# Altium PCB IS903_PCB.PcbDoc
Units mil, origin at the board's own origin, x right, y up, seen from the top; angles counter-clockwise.
Board outline 1299.21 x 551.18 mil, 4 copper layers (Top Layer, PWR, GND, Bottom Layer), stack 70.112 mil thick; 31 components, 62 nets, 442 pads, 139 vias.
Unrouted connection lines stored in the file: 101.
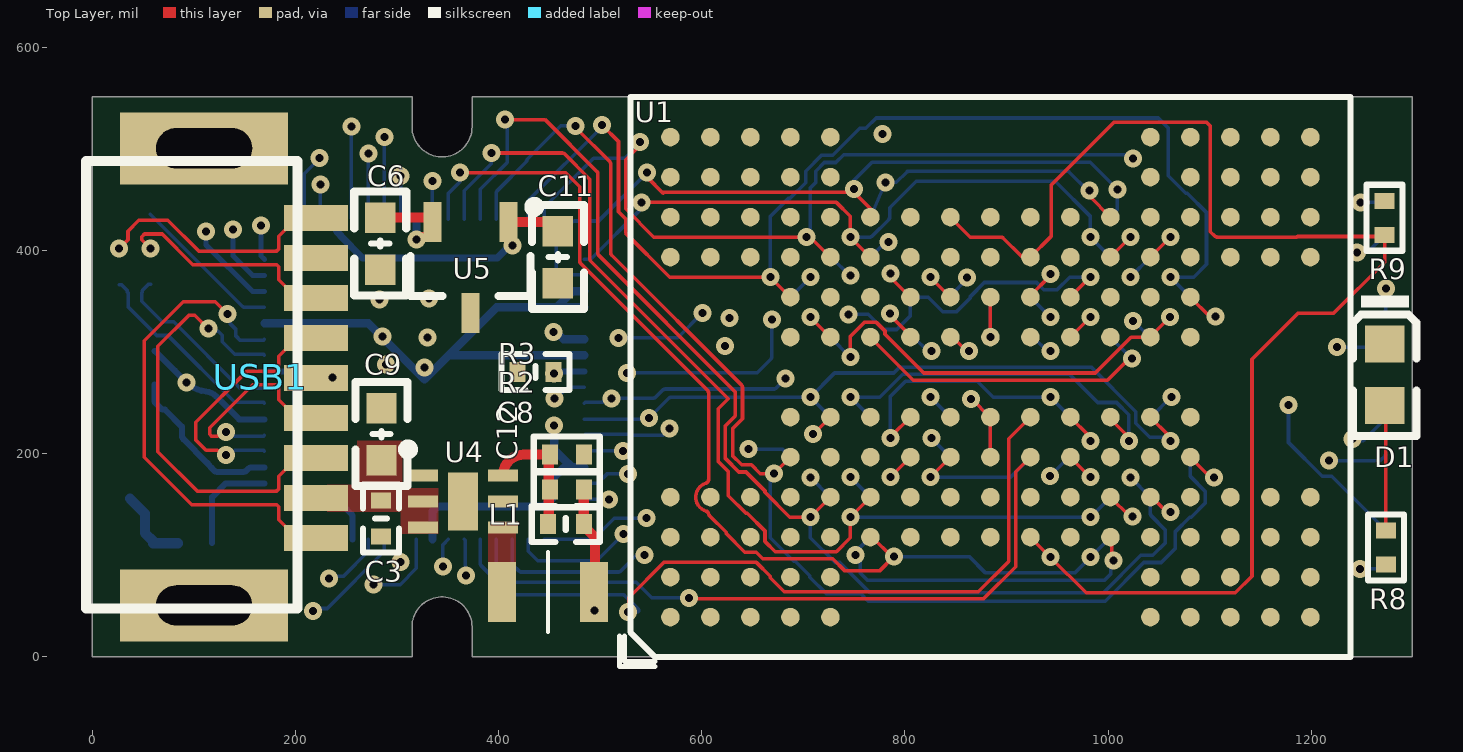
[diagram p0: Top Layer view]
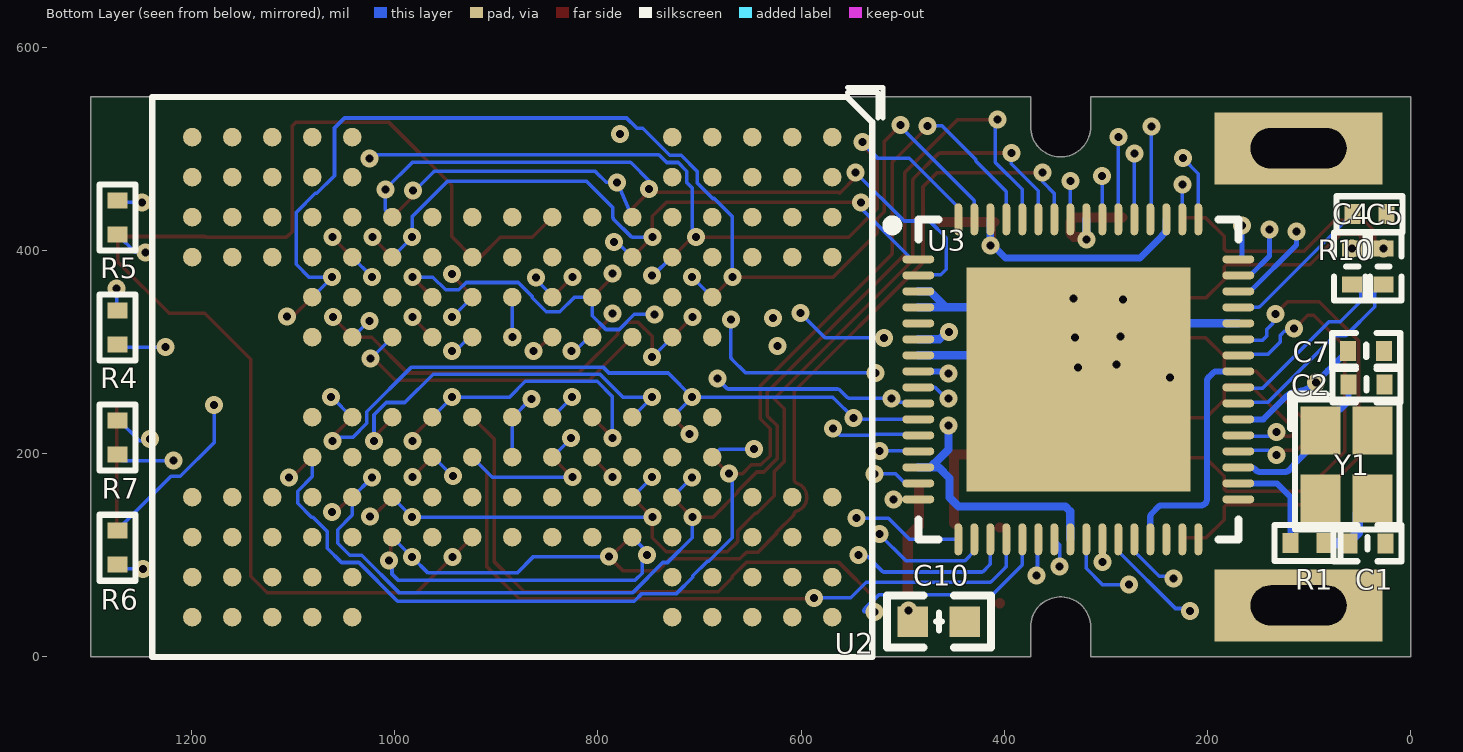
[diagram p1: Bottom Layer view, seen from below]
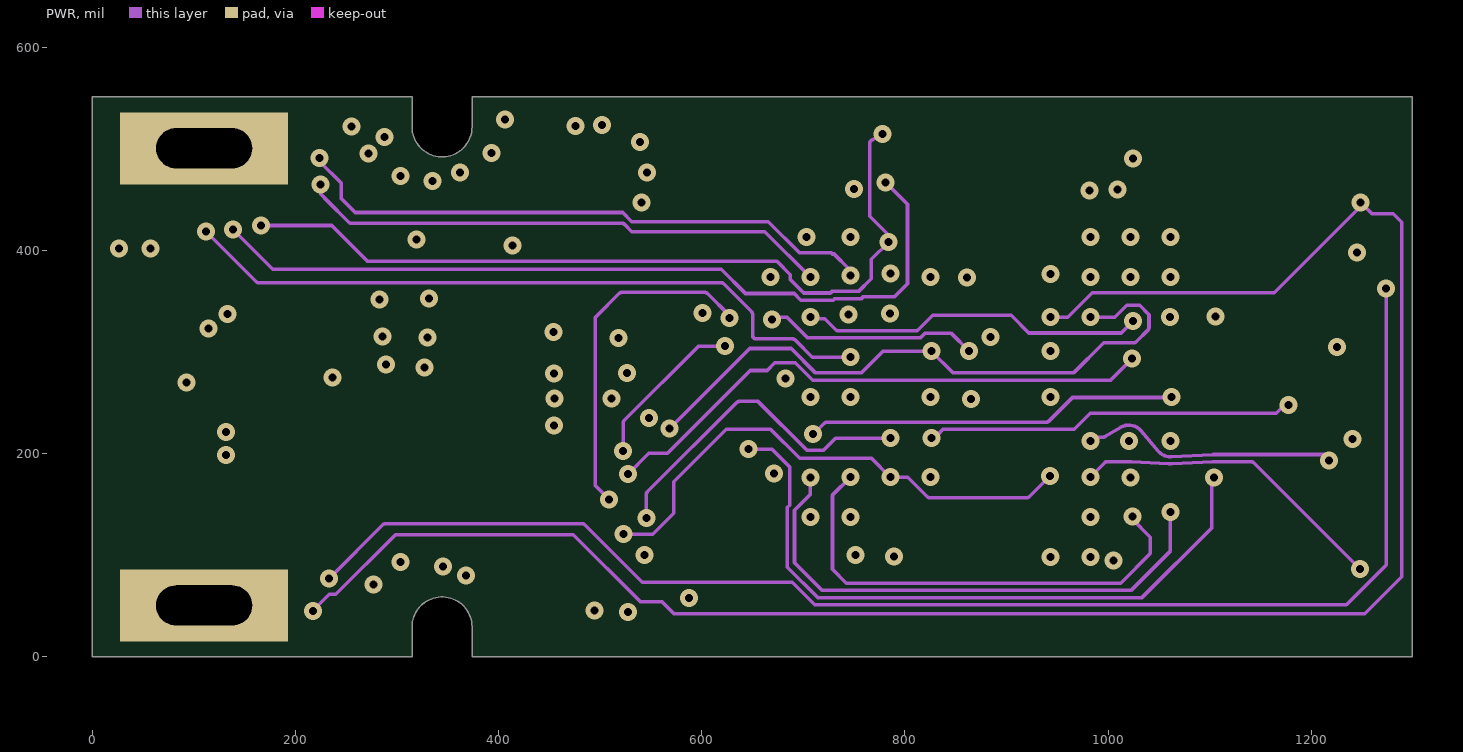
[diagram p2: PWR]
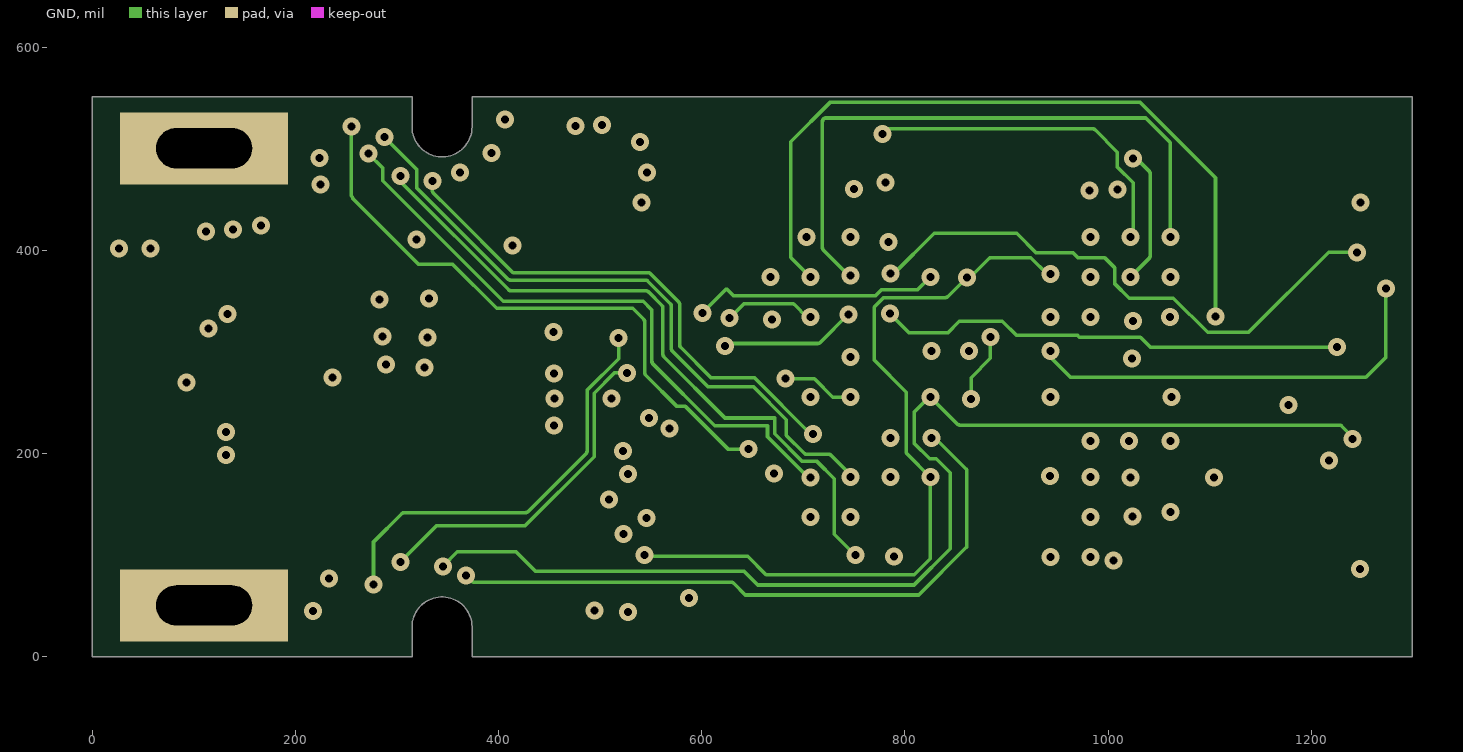
[diagram p3: GND]

## Layer stack, top to bottom
Top Solder: solder mask 1, SM-001, Dk 4
Top Layer: signal copper 1.378
Dielectric 2: prepreg 2.8, PP-006, Dk 4.1
PWR: signal copper 1.378
Dielectric 1: core 59, Core-043, Dk 4.3
GND: signal copper 1.378
Dielectric 3: prepreg 2.8, PP-006, Dk 4.1
Bottom Layer: signal copper 1.378
Bottom Solder: solder mask 1, SM-001, Dk 4

## Board outline
0,0 0,551.18 314.96,551.18 314.96,521.65 ccw(c344.49,521.65) 374.02,521.65 374.02,551.18 1299.21,551.18 1299.21,0 374.02,0 374.02,29.53 ccw(c344.49,29.53) 314.96,29.53 314.96,0

## Design rules (kind name [scope] priority, off if disabled: settings)
Clearance [All] p1: gap=3.5 ignorepadtopadclearanceinfootprint=TRUE except(5: Arc-THPad Arc-Via Arc-Hole Track-THPad Track-Via Track-Hole SMDPad-THPad SMDPad-Via SMDPad-Hole THPad-THPad THPad-Via THPad-Fill THPad-Poly THPad-Region THPad-Text THPad-Hole Via-Via Via-Fill Via-Poly Via-Region Via-Text Via-Hole Fill-Hole Poly-Hole Region-Hole Text-Hole)
DiffPairsRouting [All] p1: maxlimit=10 minlimit=10 mostfreqgap=10 toplayer_minwidth=3.5 toplayer_maxwidth=15 toplayer_prefwidth=15 midlayer1_minwidth=3.5 midlayer1_maxwidth=15 midlayer1_prefwidth=15 midlayer2_minwidth=3.5 midlayer2_maxwidth=15 midlayer2_prefwidth=15 bottomlayer_minwidth=3.5 bottomlayer_maxwidth=15 bottomlayer_prefwidth=15 maxuncoupledlength=500
FanoutControl Fanout_BGA [IsBGA] p1: bgadir=Out bgaviamode=Centered fanoutstyle=BGA fanoutdirection=Alternating viagrid=1 // Fanout_BGA (Default Rule)
PlaneClearance [All] p1: clearance=7
PlaneConnect [All] p1: planeconnectstyle=Direct reliefexpansion=20 reliefentries=4 reliefconductorwidth=10 reliefairgap=10
PolygonConnect [All] p1: connectstyle=Direct reliefconductorwidth=10 reliefentries=4 polygonreliefangle="90 Angle" airgapwidth=10
RoutingVias [All] p1: holewidth=7.87 width=17.72 viastyle="Through Hole" minholewidth=7.87 minwidth=17.72 maxholewidth=50 maxwidth=30
SolderMaskExpansion [All] p1: expansion=4 istentingtop=FALSE
UnRoutedNet [All] p1: checkbadconnections=TRUE
Width [All] p1: maxlimit=15 minlimit=3.5 preferedwidth=3.5 minimp=50.000000 maximp=50.000000 favimp=50.000000
25 further rules are at their usual default settings.

## Classes and differential pairs
net class F1CON: F1_ALE F1_CE0n F1_CE1n F1_CE2n F1_CE3n F1_CLE F1_DQS F1_REn F1_WEn
net class F0CON: F0_ALE F0_CE0n F0_CE1n F0_CE2n F0_CE3n F0_CLE F0_DQS F0_REn F0_WEn
net class F1IO: F1_IO0 F1_IO1 F1_IO2 F1_IO3 F1_IO4 F1_IO5 F1_IO6 F1_IO7
net class F0IO: F0_IO0 F0_IO1 F0_IO2 F0_IO3 F0_IO4 F0_IO5 F0_IO6 F0_IO7
differential pair NewDifferentialPair4: +NetC4_1 -NetC5_1
differential pair NewDifferentialPair3: +DP -DM
differential pair NewDifferentialPair2: +SSRXP -SSRXM
differential pair NewDifferentialPair1: +SSTXP -SSTXM

## Components (designator, comment, footprint, x,y, rotation, side; value= is the part's Value field where it differs from the comment)
C1 "20pF/6pF" "C 0402_L" 42.5,111.8 r180 bottom
C2 "20pF/6pF" "C 0402_L" 43.6,268.2 r180 bottom
C3 "0.01uF" "C 0402_L" 284.5,136.3 r270 top
C4 "0.1uF" "C 0402_L" 57.52,384.37 r270 bottom
C5 "0.1uF" "C 0402_L" 26.76,384.18 r270 bottom
C6 "10uF" "C 0603_L" 283.7,406.8 r90 top
C7 "1uF" "C 0402_L" 43.7,301.2 r0 bottom
C8 "20pF" "C 0402_L" 466.28,130.8 r180 top
C9 "4.7uF" "C 0603_L" 284.9,219.2 r270 top
C10 "10uF" "C 0603_L" 464.3,34.8 r0 bottom
C11 "4.7uF" "C 0603_L" 458.45,393.42 r90 top
C12 "0.1uF" "C 0402_L" 436.4,280.3 r180 top
D1 "R/W LED" 0603_LED_S1 1272.4,277.7 r270 top
L1 "4.7uH  ±10%" LQM2HPN1R0MG0L 448.8,63.8 r0 top
R1 "330R" "R 0402_L" 100.4,112 r0 bottom
R2 "453K" "R 0402_L" 466.28,164.95 r0 top
R3 "100K" "R 0402_L" 466.28,199.1 r0 top
R4 "0R" "R 0402_L" 1272.9,323.08 r90 bottom
R5 "0R" "R 0402_L" 1272.9,431.4 r90 bottom
R6 "0R" "R 0402_L" 1272.89,108.4 r270 bottom
R7 "0R" "R 0402_L" 1272.89,216.72 r270 bottom
R8 "330R" "R 0402_L" 1273.5,108.8 r270 top
R9 "0R" "R 0402_L" 1272.3,431.2 r90 top
R10 "100K" "R 0402_L" 41.62,435.68 r180 bottom
U1 "NAND FLASH BGA152" BGA152 1256.67,587.47 r180 top
U2 "NAND FLASH BGA152" BGA152 1256.73,-36.77 r180 bottom
U3 "IS903_QFN64_8*8" "QFN64 8x8_L" 327.12,273.19 r180 bottom
U4 "EML3020-DFN6" TDFN6 365.1,153 r0 top
U5 "EMP8733" SOT23-3L 372.3,382.9 r180 top
USB1 "USB 3.0 TYPE A" USB3.0-G 165.35,275.59 r0 top
Y1 "30MHZ" "OSC 2025-4P" 62.9,189.2 r270 bottom

## Footprints (in the part's own frame and the unit in brackets; to place one, negate y for a bottom-side part, rotate by r counter-clockwise, add the part's x,y. Pads: shape width x height; smd on the part's side, far side on the other; paste and mask are expansions set on the pad)
0603_LED_S1 [mm]
  rect 0.93x0.98 smd: A(0.77,0) K(-0.77,0)
  silkscreen extent -1.98,-0.79 1.54,0.79, body extent -0.8,-0.4 0.8,0.4, height 0.6
BGA152 [mm] "NAND FLASH"
  round 0.465 smd: A1(17.461,13.927) A2(17.461,12.927) A3(17.461,11.927) A4(17.461,10.927) A10(17.461,4.927) A11(17.461,3.927) A12(17.461,2.927) A13(17.461,1.927) B1(16.461,13.927) B2(16.461,12.927) B3(16.461,11.927) B4(16.461,10.927) B10(16.461,4.927) B11(16.461,3.927) B12(16.461,2.927) B13(16.461,1.927) C1(15.461,13.927) C2(15.461,12.927) C3(15.461,11.927) C4(15.461,10.927) C10(15.461,4.927) C11(15.461,3.927) C12(15.461,2.927) C13(15.461,1.927) D1(14.461,13.927) D2(14.461,12.927) D3(14.461,11.927) D4(14.461,10.927) D5(14.461,9.927) D6(14.461,8.927) D8(14.461,6.927) D9(14.461,5.927) D10(14.461,4.927) D11(14.461,3.927) D12(14.461,2.927) D13(14.461,1.927) E1(13.461,13.927) E2(13.461,12.927) E3(13.461,11.927) E4(13.461,10.927) E5(13.461,9.927) E6(13.461,8.927) E8(13.461,6.927) E9(13.461,5.927) E10(13.461,4.927) E11(13.461,3.927) E12(13.461,2.927) E13(13.461,1.927) F3(12.461,11.927) F4(12.461,10.927) F5(12.461,9.927) F6(12.461,8.927) F8(12.461,6.927) F9(12.461,5.927) F10(12.461,4.927) F11(12.461,3.927) G3(11.461,11.927) G4(11.461,10.927) G5(11.461,9.927) G6(11.461,8.927) G8(11.461,6.927) G9(11.461,5.927) G10(11.461,4.927) G11(11.461,3.927) H3(10.461,11.927) H4(10.461,10.927) H5(10.461,9.927) H6(10.461,8.927) H8(10.461,6.927) H9(10.461,5.927) H10(10.461,4.927) H11(10.461,3.927) J3(9.461,11.927) J4(9.461,10.927) J5(9.461,9.927) J6(9.461,8.927) J8(9.461,6.927) J9(9.461,5.927) J10(9.461,4.927) J11(9.461,3.927) K3(8.461,11.927) K4(8.461,10.927) K5(8.461,9.927) K6(8.461,8.927) K8(8.461,6.927) K9(8.461,5.927) K10(8.461,4.927) K11(8.461,3.927) L3(7.461,11.927) L4(7.461,10.927) L5(7.461,9.927) L6(7.461,8.927) L8(7.461,6.927) L9(7.461,5.927) L10(7.461,4.927) L11(7.461,3.927) M3(6.461,11.927) M4(6.461,10.927) M5(6.461,9.927) M6(6.461,8.927) M8(6.461,6.927) M9(6.461,5.927) M10(6.461,4.927) M11(6.461,3.927) N1(5.461,13.927) N2(5.461,12.927) N3(5.461,11.927) N4(5.461,10.927) N5(5.461,9.927) N6(5.461,8.927) N8(5.461,6.927) N9(5.461,5.927) N10(5.461,4.927) N11(5.461,3.927) N12(5.461,2.927) N13(5.461,1.927) P1(4.461,13.927) P2(4.461,12.927) P3(4.461,11.927) P4(4.461,10.927) P5(4.461,9.927) P6(4.461,8.927) P8(4.461,6.927) P9(4.461,5.927) P10(4.461,4.927) P11(4.461,3.927) P12(4.461,2.927) P13(4.461,1.927) R1(3.461,13.927) R2(3.461,12.927) R3(3.461,11.927) R4(3.461,10.927) R10(3.461,4.927) R11(3.461,3.927) R12(3.461,2.927) R13(3.461,1.927) T1(2.461,13.927) T2(2.461,12.927) T3(2.461,11.927) T4(2.461,10.927) T10(2.461,4.927) T11(2.461,3.927) T12(2.461,2.927) T13(2.461,1.927) U1(1.461,13.927) U2(1.461,12.927) U3(1.461,11.927) U4(1.461,10.927) U10(1.461,4.927) U11(1.461,3.927) U12(1.461,2.927) U13(1.461,1.927)
  silkscreen extent 0.46,0.93 18.73,15.17
"C 0402_L" [mm] "无极性贴片电容"
  rect 0.4x0.5 smd: 1(-0.45,0) 2(0.45,0)
  silkscreen extent -0.85,-0.45 0.85,0.45, body extent -0.5,-0.26 0.5,0.26, height 0.53
"C 0603_L" [mil] "无极性贴片电容"
  rect 30x30 smd: 1(-25.59,0) 2(25.59,0)
  silkscreen extent -51,-26 51,26, body extent -31,-16 31,16, height 32
LQM2HPN1R0MG0L [mm]
  rect 0.7x1.5 smd: 1(-1.15,0) 2(1.15,0)
  silkscreen extent 0,-1 0,1, body extent -1.43,-1 1.43,1, height 1.1
"OSC 2025-4P" [mm] "2*2.5*0.55mm(长宽高)"
  rect 1.2x1 smd: 1(-0.85,-0.65) 2(0.85,-0.65) 3(0.85,0.65) 4(-0.85,0.65)
  silkscreen extent -1.75,-1.4 1.63,1.32, body extent -1.25,-1 1.25,1, height 0.55
"QFN64 8x8_L" [mm] "PQFN, 64-Leads, Body 8.00x8.00mm, Pitch 0.40mm, Thermal Pad 5.60x5.60mm, IPC Low Density"
  oval 0.8x0.2 smd: 1(-4,3) 2(-4,2.6) 3(-4,2.2) 4(-4,1.8) 5(-4,1.4) 6(-4,1) 7(-4,0.6) 8(-4,0.2) 9(-4,-0.2) 10(-4,-0.6) 11(-4,-1) 12(-4,-1.4) 13(-4,-1.8) 14(-4,-2.2) 15(-4,-2.6) 16(-4,-3) 33(4,-3) 34(4,-2.6) 35(4,-2.2) 36(4,-1.8) 37(4,-1.4) 38(4,-1) 39(4,-0.6) 40(4,-0.2) 41(4,0.2) 42(4,0.6) 43(4,1) 44(4,1.4) 45(4,1.8) 46(4,2.2) 47(4,2.6) 48(4,3)
  oval 0.2x0.8 smd: 17(-3,-4) 18(-2.6,-4) 19(-2.2,-4) 20(-1.8,-4) 21(-1.4,-4) 22(-1,-4) 23(-0.6,-4) 24(-0.2,-4) 25(0.2,-4) 26(0.6,-4) 27(1,-4) 28(1.4,-4) 29(1.8,-4) 30(2.2,-4) 31(2.6,-4) 32(3,-4) 49(3,4) 50(2.6,4) 51(2.2,4) 52(1.8,4) 53(1.4,4) 54(1,4) 55(0.6,4) 56(0.2,4) 57(-0.2,4) 58(-0.6,4) 59(-1,4) 60(-1.4,4) 61(-1.8,4) 62(-2.2,4) 63(-2.6,4) 64(-3,4)
  rect 5.6x5.6 smd: 65(0,0)
  silkscreen extent -4.78,-4 4,4, body extent -4,-4 4,4, height 1
"R 0402_L" [mm] "1/16W贴片电阻"
  rect 0.4x0.5 smd: 1(-0.4,0) 2(0.45,0)
  silkscreen extent -0.8,-0.45 0.85,0.45, body extent -0.5,-0.25 0.5,0.25, height 0.3
SOT23-3L [mm] "3x1.3x1mm(长宽高)"
  rect 0.45x1 smd: 1(-0.95,-1.143) 2(0.95,-1.143) 3(0,1.125)
  silkscreen extent -1.73,-1.65 1.5,0.7, body extent -1.5,-1.2 1.5,1.2, height 1.05
TDFN6 [mm]
  rect 0.75x0.3 smd: 1(-1,0.65) 2(-1,0) 3(-1,-0.65) 4(1,-0.65) 5(1,0) 6(1,0.65)
  rect 0.75x1.45 smd: 7(0,0)
  silkscreen extent -1.5,1.18 -1.25,1.42, body extent -1.05,-1 1.05,1, height 0.65
USB3.0-G [mm]
  rect 1.6x0.65 smd: 1(1.397,-3.026) 2(1.397,-1.026) 3(1.397,0.974) 4(1.397,2.974) 5(1.397,3.974) 6(1.397,1.974) 7(1.397,-0.026) 8(1.397,-2.026) 9(1.397,-4.026)
  rect 4.2x1.8 hole 1 slot 2.4 at 0 deg: 10(-1.397,5.715) 11(-1.397,-5.715)
  silkscreen extent -4.34,-5.79 0.94,5.4, body extent -18.89,-6.03 1.87,5.97, height 3.3

## Part data
C1 C2 C3 C4 C5 C8 C12: library part "0402 2.2nF (222) 10% 50V", "贴片电容", Package=0402, SuppliersPartNumber=C1531, ComponentLink1Description=供应商链接, ComponentLink1URL=http://www.szlcsc.com/product/details_1883.html, Supplier=LC
C6 C7 C9 C10 C11: library part "0603 100nF (104) 10% 50V", "贴片电容", Package=0603, SuppliersPartNumber=C14663, ComponentLink1Description=供应商链接, ComponentLink1URL=http://www.szlcsc.com/product/details_15331.html, Supplier=LC
D1: library part "0603 蓝灯", "发光二极管", Package=0603, SuppliersPartNumber=C72041, ComponentLink1Description=供应商链接, ComponentLink1URL=http://www.szlcsc.com/product/details_73150.html, Supplier=LC
L1: library part "1206 4.7uH  10%", "贴片电感", Package=1206, SuppliersPartNumber=C1049, ComponentLink1Description=供应商链接, ComponentLink1URL=http://www.szlcsc.com/product/details_1401.html, Supplier=LC
R1 R2 R3 R4 R5 R6 R7 R8 R9 R10: library part "0402 22Ω (22R0) 1%", "贴片电阻", Package=0402, SuppliersPartNumber=C25092, ComponentLink1Description=供应商链接, ComponentLink1URL=http://www.szlcsc.com/product/details_25835.html, Supplier=LC
Y1: library part 晶振

## Via types
v1: diameter 17.72, hole 7.87, Top Layer to Bottom Layer, 139 vias

## Nets (pads, with @x,y where several pads share a name; then routed paths per layer and width w, separated by ;. In a path a pad name is that pad's centre, name@x,y a point inside that pad or via, vN(x,y) a via of type N, cw(c..) or ccw(c..) an arc to the next point about the centre after c; other vN are vias at no path point)
1.2V: C6.2 U3.6 U3.29 U3.41 U3.56 U5.2 | length 368.5
  Top Layer w10: C6.2 U5.2@331.04,432.39 ; v1(319.25,410.57) 321.33,410.57 323.98,413.21 331.04,413.21 334.9,417.07 U5.2
  Bottom Layer w6: U3.41 190.4,281.06 cw(c190.4,275.06) 194.65,279.3 198.67,275.28 ; 198.7,275.25 cw(c194.43,271.04) 200.43,271.04 200.43,155.16 ccw(c206.43,155.16) 206.43,149.16 245.27,149.16 cw(c245.27,145.66) 247.77,148.11 255.24,140.64 cw(c252.75,138.18) 256.25,138.2 U3.29
  Bottom Layer w8: v1(319.25,410.57) U3.56 ; v1(454.19,319.69) 456.82,319.69 463.88,312.62 484.54,312.62 U3.6
3.3V: C7.2 C8.1 C10.2 C11.2 L1.2 R2.2 R8.2 U1.D3 U1.D4 U1.D8 U1.D10 U1.D11 U1.G4 U1.G10 U1.J4 U1.J10 U1.L4 U1.L10 U1.P3 U1.P4 U1.P6 U1.P10 U1.P11 U2.D3 U2.D4 U2.D8 U2.D10 U2.D11 U2.G4 U2.G10 U2.J4 U2.J10 U2.L4 U2.L10 U2.P3 U2.P4 U2.P6 U2.P10 U2.P11 U3.14 U3.24 U3.38 U3.51 U3.62 U5.1 | length 799
  Top Layer w8: U5.1 411.87,425.73 411.87,406.86 v1(413.73,405)
  Top Layer w10: U5.1 C11.2@462.22,427.9 ; R2.2 C8.1 484,128.83 494.9,117.93 494.9,64.62 L1.2
  Bottom Layer w6: C7.2 cw(c59.13,295.66) 63.39,299.88 81.58,281.69 v1(92.98,270.29) ccw(c114.92,292.12) 112.17,261.29 cw(c110.54,244.95) 122.2,256.52 122.25,256.46 144.89,233.82 U3.38
  Bottom Layer w7: U3.51 240.51,418.98 244.82,414.67 244.82,414.12 266.22,392.71 398.82,392.71 411.1,405 v1(413.73,405) U3.62
  Bottom Layer w8: U3.24 334.99,143.27 339.68,147.96 444.85,147.96 453.69,156.8 453.69,175.82 464.38,186.51 U3.14@472.91,186.51 ; v1(454.91,227.51) 454.91,204.03 468.05,190.89 468.6,190.89 472.91,186.58 U3.14
  other v1: 494.4,45.7
DM: U3.37 USB1.2 | length 208.4
  Top Layer w3.5: v1(131.9,221.56) 128.05,221.56 123.44,216.95 117.79,216.95 115.74,219 115.74,225.35 158.19,267.8 181.56,267.8 183.61,265.75 183.61,253.22 201.65,235.18 USB1.2
  Bottom Layer w3.5: v1(131.9,221.56) 135.75,221.56 140.36,216.95 153.61,216.95 153.9,217.24 168.8,217.24 U3.37
DP: U3.36 USB1.3 | length 253.2
  Top Layer w3.5: v1(131.9,198.84) 128.05,198.84 123.44,203.45 112.2,203.45 102.24,213.41 102.24,230.94 152.6,281.3 181.56,281.3 183.61,283.35 183.61,295.87 201.65,313.92 USB1.3
  Bottom Layer w3.5: v1(131.9,198.84) 135.75,198.84 140.36,203.45 153.61,203.45 153.9,203.16 168.8,203.16 U3.36
F0_ALE: U1.L9 U2.G5 U3.13 | length 656
  Top Layer w3.5: U1.L9 v1(982.6,373.84)
  PWR w3.5: v1(522.79,202.74) 522.79,230.31 cw(c526.29,230.31) 523.81,232.78 596.89,305.86 v1(623.04,305.86)
  GND w3.5: v1(623.04,305.86) cw(c626.52,305.52) 627.29,308.93 629.14,308.52 ccw(c629.9,311.94) 629.9,308.44 714.22,308.44 ccw(c714.22,311.94) 716.7,309.47 v1(744.31,337.08)
  Bottom Layer w3.5: U3.13 485.01,202.74 v1(522.79,202.74) ; v1(744.31,337.08) 764.11,337.08 778.95,322.24 791.89,322.24 805.5,335.86 U2.G5 822.97,354.06 837.37,339.66 850.84,339.66 864.55,353.38 864.55,354.74 878.27,368.46 929.58,368.46 936.83,361.21 949.76,361.21 962.36,373.81 v1(982.6,373.84)
F0_CE0n: U1.K5 U3.20 | length 677.6
  Top Layer w3.5: v1(587.38,57.89) 588.53,57.4 ccw(c589.9,60.63) 589.9,57.13 877.43,57.13 909.15,88.84 909.15,182.24 U1.K5
  Bottom Layer w3.5: U3.20 397.99,90.21 ccw(c401.49,90.21) 398.25,88.87 398.28,88.8 ccw(c401.51,90.15) 399.02,87.69 412.2,74.51 ccw(c414.68,76.98) 414.68,73.48 535.68,73.48 550.96,58.2 585.94,58.2 cw(c585.94,54.7) v1(587.38,57.89)
F0_CE1n: U1.K6 U3.21 | length 789.5
  Top Layer w3.5: v1(527.7,44.24) 528.1,44.64 528.1,58.35 562.68,92.93 653.93,92.93 667.64,79.21 667.64,77.85 681.36,64.13 872.36,64.13 902.15,93.91 902.15,214.61 U1.K6
  Bottom Layer w3.5: U3.21 382.24,91.84 ccw(c385.74,91.84) 383.26,89.37 410.3,62.33 ccw(c412.77,64.81) 412.77,61.31 521.83,61.31 cw(c521.83,57.81) 524.32,60.27 534.02,50.56 536.99,47.59 cw(c534.54,45.1) 538.04,45.1 537.18,44.24 v1(527.7,44.24)
F0_CE2n: R6.1 U2.H9 U3.22 | length 1240.1
  PWR w3.5: v1(826.18,215.27) 828.86,217.95 831.59,217.95 837.52,223.88 966.63,223.88 982.54,239.79 1165.7,239.79 1173.74,247.83 v1(1177.59,247.83)
  GND w3.5: v1(368.09,80.04) 373.6,74.53 ccw(c376.08,77) 376.08,73.5 628.97,73.5 cw(c628.97,70) 631.44,72.47 643.05,60.87 813.7,60.87 860.09,107.26 ccw(c857.62,109.74) 861.12,109.74 861.12,182.73 ccw(c857.62,182.73) 860.09,185.2 830.03,215.27 v1(826.18,215.27)
  Bottom Layer w3.5: U3.22 367.26,114.94 367.26,80.87 v1(368.09,80.04) ; v1(826.18,215.27) U2.H9 ; v1(1177.59,247.83) 1177.59,211 1210.97,177.61 1220.06,177.61 1273.21,124.47 R6.1
F0_CE3n: R7.1 U2.H8 U3.23 | length 1239.4
  GND w3.5: v1(345.37,89.11) 359.57,103.31 417.34,103.31 436.19,84.46 641.48,84.46 655.2,70.74 809.05,70.74 844.63,106.32 844.63,181.23 830.84,195.02 824.36,195.02 809.06,210.32 809.06,240.9 823.8,255.64 v1(825.18,255.64) 851.64,229.18 ccw(c854.12,231.65) 854.12,228.15 1227.61,228.15 cw(c1227.61,224.65) 1230.09,227.12 1239.52,217.69 cw(c1237.04,215.22) 1240.54,215.22 v1(1240.54,214.27)
  Bottom Layer w3.5: v1(345.37,89.11) 345.37,110.34 U3.23 ; v1(825.18,255.64) U2.H8 ; v1(1240.54,214.27) 1248.87,212.62 ccw(c1249.56,216.05) 1252.03,213.58 1270.93,232.47 R7.1
F0_CLE: U1.L8 U2.G6 U3.12 | length 771.6
  Top Layer w3.5: U1.L8 v1(982.61,334.44)
  PWR w3.5: v1(568.49,224.72) 647.29,303.52 688.04,303.52 712.13,279.43 757.08,279.43 778.5,300.85 v1(826.13,300.85) 847.55,279.43 965.93,279.43 995.64,309.14 1025.28,309.14 ccw(c1025.28,312.64) 1027.77,310.17 ; v1(982.61,334.44) 1006.72,334.44 1018.25,345.97 1031.19,345.97 1040.33,336.83 1040.33,324.18 cw(c1036.83,324.18) 1039.3,321.71 1027.77,310.18
  Bottom Layer w3.5: U3.12 485.44,218.91 530.1,218.91 530.79,218.21 561.98,218.21 v1(568.49,224.72) ; U2.G6 808.9,314.69 822.73,300.85 v1(826.13,300.85)
F0_DQS: U1.N8 U2.E6 U3.46 | length 1201.6
  Top Layer w3.5: v1(746.45,295.04) 746.45,315.5 760.1,329.15 772.04,329.15 780.47,320.72 780.47,317.64 818.72,279.4 987.31,279.4 1022.66,314.75 U1.N8 1041.66,314.99 1060.86,334.19 v1(1060.86,334.44)
  PWR w3.5: v1(112.28,418.53) 161.53,369.28 ccw(c164.01,371.75) 164.01,368.25 603.4,368.25 603.46,368.31 616.39,368.31 616.46,368.25 619.21,368.25 cw(c619.21,364.75) 621.7,367.21 649.16,339.74 cw(c646.69,337.27) 650.19,337.27 650.19,316.4 ccw(c653.69,316.4) 653.69,312.9 689.71,312.9 cw(c689.71,309.4) 692.19,311.87 709.02,295.04 719.21,295.04 v1(746.45,295.04)
  Bottom Layer w3.5: U2.E6 v1(746.45,295.04)
  Bottom Layer w5: v1(112.28,418.53) 112.28,405.35 157.83,359.8 U3.46
F0_IO0: U1.M11 U2.F3 U3.47 | length 1157.5
  Top Layer w3.5: v1(981.84,459.24) 981.84,453.31 U1.M11
  PWR w3.5: v1(138.87,420.41) 177.87,381.41 619.42,381.41 643.16,357.67 691.18,357.67 697.71,351.14 729.66,351.14 731.21,352.69 757.36,352.69 759.31,354.64 790.07,354.64 802.6,367.17 802.6,445.41 v1(781,467.01)
  Bottom Layer w3.5: U2.F3 v1(781,467.01) 791.64,467.01 801.73,477.1 cw(c804.21,474.63) 804.24,478.13 959.35,478.13 cw(c959.38,474.63) 961.83,477.13 ; 961.85,477.1 979.72,459.24 v1(981.84,459.24)
  Bottom Layer w5: v1(138.87,420.41) 138.87,394.51 157.83,375.55 U3.47
F0_IO1: U1.M10 U2.F4 U3.48 | length 1222.8
  Top Layer w3.5: U1.M10 v1(1021.98,413.18)
  PWR w3.5: v1(166.1,424.6) 235.92,424.6 271.13,389.39 674.11,389.39 687.36,376.14 687.36,371.39 700.61,358.14 726.76,358.14 728.31,359.69 754.46,359.69 767.1,372.32 767.1,391.32 v1(784,408.22) 784,414.93 765.39,433.54 765.39,505.45 cw(c768.89,505.45) 766.41,507.92 cw(c768.89,505.45) 767.16,508.49 v1(778.21,514.8)
  GND w3.5: v1(778.21,514.8) 778.25,516.31 cw(c781.75,516.22) 781.68,519.72 984.77,519.72 cw(c984.77,516.22) 987.26,518.68 1009.16,496.77 1009.16,482.17 1024.77,466.57 1024.77,436.92 1024.77,417.44 cw(c1021.27,417.42) 1023.74,414.94 v1(1021.98,413.18)
  Bottom Layer w3.5: U2.F4 780.92,408.22 v1(784,408.22)
  Bottom Layer w5: v1(166.1,424.6) 166.1,394.84 U3.48
F0_IO2: U1.N10 U2.E4 U3.49 | length 1316.5
  Top Layer w3.5: U1.N10 v1(1061.35,413.18)
  PWR w3.5: v1(224.11,490.78) 224.11,487.45 245.23,466.33 245.23,451.15 258.98,437.4 522.24,437.4 531.25,428.39 665.66,428.39 696.48,397.57 727.76,397.57 728.8,396.53 730.25,396.53 745.42,381.36 cw(c742.95,378.88) 746.45,378.88 v1(746.45,375.3)
  GND w3.5: v1(746.45,375.3) 744.89,375.3 719.94,400.25 cw(c722.41,402.73) 718.91,402.73 718.91,526.91 cw(c722.41,526.91) 722.41,530.41 1037.14,530.41 1061.35,506.2 v1(1061.35,413.18)
  Bottom Layer w3.5: U3.49 209.01,475.68 v1(224.11,490.78) ; U2.E4 727.54,393.43 745.67,375.3 v1(746.45,375.3)
F0_IO3: U1.P9 U2.D5 U3.50 | length 1362.1
  Top Layer w3.5: U1.P9 1100.16,334.99 v1(1105.76,334.99)
  PWR w3.5: v1(224.76,464.73) 224.76,457.19 ccw(c228.26,457.19) 225.78,454.72 231.31,449.19 252.74,427.75 ccw(c255.22,430.23) 255.22,426.73 521.56,426.73 cw(c521.56,423.23) 524.04,425.7 531.2,418.54 662.28,418.54 v1(707.08,373.75)
  GND w3.5: v1(707.08,373.75) 687.69,393.13 687.69,507.04 726.34,545.69 1031.76,545.69 1105.76,471.69 v1(1105.76,334.99)
  Bottom Layer w3.5: U3.50 v1(224.76,464.73) ; U2.D5 v1(707.08,373.75)
F0_IO4: U1.P5 U2.D9 U3.52 | length 1416.8
  Top Layer w3.5: U1.P5 1099.27,178.4 v1@1102.17,178.4 ; v1@1102.25,176.95 1102.64,176.57 v1(1104.17,176.57)
  PWR w3.5: v1(646.05,204.55) 668.95,204.55 686.64,186.86 686.64,149.39 684.41,147.15 684.41,88.24 714.29,58.36 1033.42,58.36 1102.25,127.19 1102.25,174.65 v1(1104.17,176.57)
  GND w3.5: v1(255.19,521.82) 255.19,454 256.25,452.94 ccw(c259.75,452.94) 257.28,450.47 321.1,386.64 354.62,386.64 398.26,343 532.2,343 542.88,332.32 cw(c540.41,329.84) 543.91,329.84 543.91,279.73 ccw(c547.41,279.73) 544.94,277.25 575.72,246.47 584.04,246.47 625.96,204.55 v1(646.05,204.55)
  Bottom Layer w3.5: v1(255.19,521.82) 255.19,431.73 U3.52 ; v1(646.05,204.55) 679.42,204.55 U2.D9
F0_IO5: U1.N4 U2.E10 U3.53 | length 1255.6
  Top Layer w3.5: U1.N4 1043.2,157.27 1057.83,142.64 v1(1061.43,142.64)
  PWR w3.5: v1(707.07,176.73) 707.07,159.92 691.41,144.25 691.41,92.77 718.82,65.36 1022.54,65.36 1061.43,104.25 v1(1061.43,142.64)
  GND w3.5: v1(272,495.26) 286.02,481.24 286.02,468.74 404.76,350 542.42,350 550.05,342.37 cw(c547.58,339.89) 551.08,339.89 551.08,290.78 ccw(c554.58,290.78) 552.11,288.3 612.97,227.44 664.63,227.44 664.81,227.62 664.81,216.66 704.74,176.73 v1(707.07,176.73)
  Bottom Layer w3.5: U3.53 v1(272,495.26) ; v1(707.07,176.73) 707.16,176.73 726.68,157.21 U2.E10
F0_IO6: U1.M4 U2.F10 U3.54 | length 1255.1
  Top Layer w3.5: U1.M4 1021.22,138.34 v1(1024.15,138.34)
  PWR w3.5: v1(746.44,176.9) 728.8,159.25 728.8,86.29 742.47,72.62 1012.49,72.62 1041.66,101.79 1041.66,117.9 1024.15,135.41 v1(1024.15,138.34)
  GND w3.5: v1(287.65,511.74) 319.39,480 319.39,461.77 409.26,371.9 ccw(c411.74,374.37) 411.74,370.87 544.49,370.87 cw(c544.49,367.37) 546.96,369.84 569.19,347.61 cw(c566.72,345.14) 570.22,345.14 570.22,303.27 ccw(c573.72,303.27) 571.25,300.79 606,266.04 650.77,266.04 683.31,233.5 683.31,217.95 700.9,200.36 ccw(c703.38,202.84) 703.38,199.34 725.21,199.34 cw(c725.21,195.84) 727.69,198.3 727.73,198.27 745.43,180.56 745.43,177.91 v1(746.44,176.9)
  Bottom Layer w3.5: v1(287.65,511.74) 287.65,430.77 U3.54 ; v1(746.44,176.9) U2.F10
F0_IO7: U1.M3 U2.F11 U3.55 | length 1052.4
  Top Layer w3.5: U1.M3 1003.8,116.39 1003.8,96.53 v1(1005.31,95.02)
  GND w3.5: v1(303.78,473.05) 303.78,468.93 ccw(c307.28,468.93) 304.8,466.45 409.98,361.28 ccw(c412.46,363.75) 412.46,360.25 545.21,360.25 cw(c545.21,356.75) 547.69,359.22 560.81,346.09 cw(c558.34,343.62) 561.84,343.62 561.84,297.71 ccw(c565.34,297.71) 562.87,295.23 623,235.1 671.81,235.1 671.81,219.56 699.03,192.34 713.54,192.34 730.61,175.27 730.61,120.81 751.26,100.16 v1(751.4,100.16)
  Bottom Layer w3.5: U3.55 303.64,430.81 303.64,472.91 v1(303.78,473.05) ; v1(751.4,100.16) 751.9,100.16 v1@754.92,103.18 ; U2.F11 754.92,106.63 v1@754.92,103.18 ; v1(1005.31,95.02) 1002.59,92.3 1002.59,81.54 996.66,75.61 763.11,75.61 756.33,82.39 756.33,95.09 754.92,96.5 v1@754.92,103.18
F0_REn: U1.N6 U2.E8 U3.11 | length 694.5
  Top Layer w3.5: U1.N6 1060.32,217.35 cw(c1057.85,214.87) 1061.35,214.87 v1(1061.35,212.54)
  Bottom Layer w3.5: U3.11 545.47,233.82 ccw(c545.47,237.32) 547.95,234.85 v1(548.37,235.27) 567.7,254.6 cw(c570.19,252.14) 570.16,255.64 ; 570.19,255.64 v1(707.07,255.64) ; U2.E8 v1(707.07,255.64) ; v1(1061.35,212.54) 1061.3,213.11 ccw(c1057.81,212.82) 1057.86,216.32 1040.98,216.32 1027.32,229.98 1027.32,241.25 983.32,285.24 794.92,285.24 789.07,279.4 730.83,279.4 v1(707.07,255.64)
F0_WEn: U1.M6 U2.F8 U3.10 | length 663.8
  Top Layer w3.5: U1.M6 1002.29,234.47 1020.44,216.32 v1(1020.44,212.54)
  GND w3.5: v1(682.42,273.77) 711.01,273.77 729.15,255.64 v1(746.44,255.64)
  Bottom Layer w3.5: U3.10 485.44,250.4 502.55,250.4 506.86,254.72 v1@510.71,254.72 ; v1(511.05,254.38) v1@510.71,254.72 ; v1(682.42,273.77) 673.31,264.66 cw(c670.83,267.13) 670.83,263.63 564.28,263.63 ccw(c564.28,260.13) 561.79,262.6 554.95,255.76 cw(c552.46,258.22) 552.46,254.72 v1@510.71,254.72 ; U2.F8 v1(746.44,255.64) 775.21,255.64 797.82,278.24 962.11,278.24 990,250.35 1008.32,250.35 1020.32,238.35 1020.32,214.91 cw(c1016.94,213.99) 1020.44,213.99 v1(1020.44,212.54)
F1_ALE: U1.G5 U2.L9 U3.18 | length 693
  Top Layer w3.5: v1(785.75,176.95) U1.G5
  PWR w3.5: v1(522.89,120.84) 552.04,120.84 572.6,141.4 572.6,172.37 624.37,224.14 667.72,224.14 696.41,195.45 767.26,195.45 v1(785.75,176.95) 802.79,176.95 822.17,157.58 ccw(c824.64,160.05) 824.64,156.55 919.95,156.55 ccw(c919.95,160.05) 922.43,157.58 v1(942.7,177.85)
  Bottom Layer w3.5: U3.18 429.48,103.9 438.67,94.71 496.76,94.71 v1(522.89,120.84) ; v1(942.7,177.85) 961.43,196.58 U2.L9
F1_CE0n: U1.H9 U3.25 | length 857.6
  Top Layer w3.5: v1(825.12,373.81) U1.H9
  PWR w3.5: v1@275.86,69.94 v1(277.05,71.13)
  GND w3.5: v1(277.05,71.13) 277.05,113.09 304.97,141.01 cw(c307.45,138.54) 307.45,142.04 426.88,142.04 ccw(c426.88,145.54) 429.36,143.07 486.18,199.89 ccw(c483.71,202.37) 487.21,202.37 487.21,262.51 518.26,293.56 v1(518.26,314.09) ; v1(600.64,338.4) 623.89,361.65 625.12,361.65 631.13,355.64 771.24,355.64 777.11,361.51 812.83,361.51 v1(825.12,373.81)
  Bottom Layer w3.5: v1(277.05,71.13) 303.26,71.13 319.25,87.11 U3.25 ; v1(518.26,314.09) 576.33,314.09 v1(600.64,338.4)
F1_CE1n: U1.H8 U3.26 | length 782.9
  Top Layer w3.5: v1@303.5,92.98 v1(303.5,93.44) ; U1.H8 847.08,314.75 860.98,300.85 v1(863.26,300.85)
  PWR w3.5: v1(669.11,331.97) cw(c672.32,330.56) 672.32,334.06 684.14,334.06 704.31,313.89 815.2,313.89 820.03,318.72 845.39,318.72 v1(863.26,300.85)
  GND w3.5: v1(303.5,93.44) 339.02,128.96 426.21,128.96 494.21,196.96 494.21,259.61 514.16,279.56 v1(526.77,279.56)
  Bottom Layer w3.5: v1(303.5,93.44) U3.26 ; v1(526.77,279.56) 654.69,279.56 668.08,292.95 ccw(c665.61,295.43) 669.11,295.43 v1(669.11,331.97)
F1_CE2n: R5.2 U2.K5 U3.27 | length 2058.4
  PWR w3.5: v1(217.36,45.32) 233.55,61.51 240,61.51 298.71,120.22 473.79,120.22 539.55,54.46 560.61,54.46 572.79,42.28 1252.63,42.28 1289.12,78.77 1289.12,427.7 1280.64,436.18 1259.8,436.18 v1(1248.6,447.38) ; v1(943.3,334.37) 960.47,334.37 984.44,358.34 1163.69,358.34 v1@1249.22,443.87
  Bottom Layer w3.5: v1(217.36,45.32) 219.66,47.62 231.47,47.62 287.75,103.9 U3.27 ; U2.K5 v1(943.3,334.37) ; v1(1248.6,447.38) 1271.16,447.38 R5.2
F1_CE3n: R4.2 U2.K6 U3.28 | length 1912.8
  PWR w3.5: v1(233.41,77.12) 234.68,78.39 286.27,129.98 cw(c288.76,127.52) 288.76,131.02 482.59,131.02 cw(c482.59,127.52) 485.07,129.99 541.56,73.5 689.25,73.5 711.39,51.36 1234.63,51.36 1273.75,90.48 1273.75,362.37 v1(1273.51,362.61)
  GND w3.5: v1(943.3,300.85) 943.3,295 962.98,275.32 1253.83,275.32 1273.51,295 v1(1273.51,362.61)
  Bottom Layer w3.5: v1(233.41,77.12) 235.71,79.42 247.52,79.42 272,103.9 U3.28 ; U2.K6 926.53,314.69 940.37,300.85 v1(943.3,300.85) ; R4.2 1273.51,341.41 v1(1273.51,362.61)
F1_CLE: U1.G6 U2.L8 U3.17 | length 703.6
  Top Layer w3.5: v1(785.75,215.27) cw(c789.23,214.85) 786.75,217.32 U1.G6
  PWR w3.5: v1(545.57,136.45) 545.57,159.97 cw(c549.07,159.97) 546.6,162.45 634.53,250.38 cw(c637.01,247.91) 637.01,251.41 655.5,251.41 703.37,203.54 720.07,203.54 731.81,215.27 v1(785.75,215.27)
  Bottom Layer w3.5: U3.17 493.23,115.71 513.97,136.45 v1(545.57,136.45) ; v1(785.75,215.27) 785.75,256.28 800.71,271.24 871.28,271.24 886.89,255.64 v1(943.29,255.64) U2.L8
F1_DQS: U1.E6 U2.N8 U3.57 | length 966.7
  Top Layer w3.5: v1(709.84,219.15) U1.E6
  PWR w3.5: v1(709.84,219.15) 720.54,229.85 cw(c723.02,227.38) 723.02,230.88 938.26,230.88 ccw(c938.26,234.38) 938.94,230.95 cw(c943.37,208.78) 939.89,231.12 ccw(c939.36,234.57) 941.83,232.1 965.04,255.31 1062.09,255.31 v1(1062.64,255.86)
  GND w3.5: v1(334.99,468.24) 334.99,458.96 ccw(c338.49,458.96) 336.02,456.49 351.98,440.52 414.38,378.13 547.13,378.13 cw(c547.13,374.63) 549.62,377.09 577.26,349.44 cw(c574.79,346.97) 578.29,346.97 578.29,307.25 ccw(c581.79,307.25) 579.32,304.77 609.22,274.87 651.84,274.87 652.1,274.61 706.54,220.17 ccw(c709.01,222.65) 709.01,219.15 v1(709.84,219.15)
  Bottom Layer w3.5: U3.57 v1(334.99,468.24) ; U2.N8 1042.23,235.95 1062.13,255.86 v1(1062.64,255.86)
F1_IO0: U1.F3 U2.M11 U3.58 | length 1037.9
  Top Layer w3.5: v1(362.13,476.56) 466.18,476.56 479.94,462.8 479.94,389.73 ccw(c483.44,389.73) 480.97,387.25 605.75,262.47 cw(c603.28,259.99) 606.78,259.99 606.78,174.34 cw(c603.28,174.37) 604.32,171.03 ccw(c608.59,157.27) 604.32,143.51 cw(c603.28,140.17) 606.53,141.47 607.03,140.22 ccw(c610.28,141.53) 607.81,139.05 624.12,122.74 624.12,121.37 642.36,103.13 653.63,103.13 660.26,96.5 729.1,96.5 741.05,84.55 775.07,84.55 788.25,97.73 v1(789.25,98.73) 787.24,98.73 768.07,117.9 U1.F3
  Bottom Layer w3.5: U3.58 350.74,456.14 362.13,467.53 v1(362.13,476.56) ; v1(789.25,98.73) 863.34,98.73 879.46,82.61 967.12,82.61 v1(982.66,98.15) U2.M11
F1_IO1: U1.F4 U2.M10 U3.59 | length 1026.4
  Top Layer w3.5: v1(393.07,495.93) 462.67,495.93 cw(c462.67,492.43) 465.16,494.89 488.9,471.15 cw(c486.41,468.69) 489.91,468.72 489.91,391.9 ccw(c493.41,391.9) 490.93,389.43 ; 490.93,389.43 626.22,254.14 616.44,244.36 616.44,192.29 626.22,182.51 626.22,158.64 643.61,141.25 644.98,141.25 662.36,123.87 662.36,113.63 672.49,103.5 732.67,103.5 746.38,117.21 v1(746.38,137.58) U1.F4
  Bottom Layer w3.5: U3.59 366.49,458.85 393.07,485.43 v1(393.07,495.93) ; v1(746.38,137.58) v1@982.63,137.55 ; v1(982.66,137.52) U2.M10
F1_IO2: U1.E4 U2.N10 U3.60 | length 1191.2
  Top Layer w3.5: v1(406.61,528.88) 445.76,528.88 ; 445.79,528.88 496.86,477.8 cw(c494.39,475.33) 497.89,475.33 497.89,397.43 ccw(c501.39,397.47) 498.91,394.99 632.17,261.74 cw(c629.72,259.24) 633.22,259.27 633.22,237.14 623.44,227.36 623.44,195.19 636.69,181.94 643.66,181.94 662.36,163.24 662.36,161.87 686.65,137.58 v1(707.01,137.58) U1.E4
  Bottom Layer w3.5: U3.60 382.24,460.21 408.68,486.65 408.68,526.81 v1(406.61,528.88) ; v1(707.01,137.58) 707.01,117.22 731.36,92.87 735.95,92.87 764.9,63.92 ccw(c767.38,66.39) 767.38,62.89 995.26,62.89 1032.24,99.87 1044.12,99.87 1056.12,111.87 1056.12,125.26 1042.75,138.63 cw(c1045.22,141.11) 1041.72,141.11 U2.N10 1041.56,157.21 1022.2,176.57 v1(1022.03,176.57)
F1_IO3: U1.D5 U2.P9 U3.61 | length 1226.5
  Top Layer w3.5: v1@482.7,522.7 v1(475.66,522.7) ccw(c479.16,522.86) 476.68,520.39 509.33,487.74 cw(c506.87,485.25) 510.37,485.28 ; 510.37,485.25 510.37,397.9 ccw(c513.87,397.9) 511.4,395.42 639.17,267.65 cw(c636.72,265.15) 640.22,265.18 ; 640.22,265.15 640.22,234.24 630.44,224.47 630.44,198.08 639.58,188.94 649.02,188.94 657.58,180.39 v1(671.04,180.39) ; v1@671.06,180.37 U1.D5
  Bottom Layer w3.5: U3.61 397.99,456.58 cw(c401.49,456.58) 399.01,459.05 427.22,487.26 ccw(c424.75,489.74) 428.25,489.74 461.21,522.7 v1(475.66,522.7) ; v1@671.04,180.35 667.64,176.95 667.64,117.22 690.68,94.18 692.05,94.18 706.42,79.81 706.42,78.44 722.53,62.33 756.6,62.33 764.05,54.87 997.14,54.87 1035.14,92.87 1052.25,92.87 1066.33,106.95 1066.33,123.45 1080.41,137.53 1081.77,137.53 1095.49,151.24 1095.49,163.18 1081.09,177.58 U2.P9
F1_IO4: U1.D9 U2.P5 U3.63 | length 1148.2
  Top Layer w3.5: v1(502.06,523.41) 518.19,507.28 518.19,438.02 525.1,431.11 525.1,417.24 568.53,373.81 v1(667.64,373.78) ; v1(667.64,373.78) U1.D9
  Bottom Layer w3.5: U3.63 429.48,449.13 502.06,521.71 v1(502.06,523.41) ; v1(667.64,373.78) 667.64,433.43 685.39,451.17 686.76,451.17 702.33,466.74 702.33,478.01 717.89,493.57 729.16,493.57 755.73,520.14 761.48,520.14 771.74,530.41 1049.31,530.41 1059.18,520.54 1059.18,473.71 1076.65,456.24 1078.02,456.24 1096.89,437.37 1096.89,386.37 1084.27,373.75 1061.61,373.75 v1(1061.4,373.95) ; v1@1061.4,373.75 U2.P5
F1_IO5: U1.E10 U2.N4 U3.64 | length 977.1
  Top Layer w3.5: v1(539.5,506.91) 539.5,503.56 525.19,489.25 525.19,440.92 552.94,413.18 v1(703.3,413.18) 705.56,413.18 cw(c705.56,409.68) 708.04,412.15 U1.E10
  GND w3.5: v1(1022.03,373.95) 1023.38,375.3 1023.59,375.3 1040.32,392.03 ccw(c1037.85,394.51) 1041.35,394.51 1041.35,475.79 ccw(c1037.85,475.79) 1040.32,478.27 1027.99,490.6 v1(1024.77,490.6)
  Bottom Layer w3.5: U3.64 445.23,442.48 493.64,490.89 523.74,490.89 ccw(c523.74,494.39) 524.72,491.03 539.5,505.81 v1(539.5,506.91) ; v1(703.3,413.18) 703.51,413.18 ccw(c703.51,416.68) 707.01,416.68 707.01,461.52 712.36,466.87 712.36,478.14 720.79,486.57 732.06,486.57 739.84,494.35 752.98,494.35 1018.81,494.35 cw(c1018.81,489.03) 1022.58,492.79 v1(1024.77,490.6) ; v1(1022.03,373.95) 1022.14,373.95 1041.62,393.43 U2.N4
F1_IO6: U1.F10 U2.M4 U3.1 | length 669.5
  Top Layer w3.5: v1(540.92,447.26) 732.67,447.26 746.38,433.55 v1(746.38,413.18) U1.F10
  Bottom Layer w3.5: U3.1 489.44,391.3 ccw(c489.44,394.8) 491.93,392.34 539.9,440.31 ccw(c537.42,442.78) 540.92,442.78 v1(540.92,447.26) ; v1(746.38,413.18) 765.43,413.18 ccw(c765.43,416.68) 767.91,414.21 784.06,430.36 ccw(c781.6,432.85) 785.1,432.84 785.1,440.69 cw(c788.6,440.69) 786.13,443.17 811.11,468.15 948,468.15 982.66,433.49 v1(982.66,413.12) U2.M4
F1_IO7: U1.F11 U2.M3 U3.2 | length 741.7
  Top Layer w3.5: v1(546.2,476.65) 546.2,472.27 562,456.46 cw(c564.48,453.99) 564.48,457.49 v1@749.78,457.49 ; v1(749.78,460.35) v1@749.78,457.49 ; U1.F11 766.07,439.75 ccw(c762.57,439.75) 765.02,442.25 v1@749.78,457.49
  Bottom Layer w3.5: 474.92,429.01 ccw(c474.96,425.51) 472.5,428 458.03,413.54 ccw(c460.51,411.06) 457.01,411.06 457.01,381.38 462.32,376.07 484.08,376.07 U3.2 ; 474.96,429.01 498.56,429.01 v1(546.2,476.65) ; v1(749.78,460.35) 749.78,468.94 766.63,485.79 cw(c769.11,483.32) 769.11,486.82 801.55,486.82 982.44,486.82 v1(1009.16,460.1) 1009.16,441.06 cw(c1005.66,441.06) 1008.13,438.58 U2.M3
F1_REn: U1.E8 U2.N6 U3.16 | length 846.5
  Top Layer w3.5: v1(707.01,334.44) U1.E8
  PWR w3.5: v1(508.85,155.08) 495.1,168.83 495.1,332.46 cw(c498.6,332.46) 496.12,334.93 518.93,357.74 cw(c521.41,355.27) 521.41,358.77 603.14,358.77 cw(c603.14,355.27) 605.6,357.76 627.44,335.92 v1(627.44,333.3) ; v1(707.01,334.44) 708.6,332.85 721.12,332.85 732.05,321.92 ccw(c734.53,324.39) 734.53,320.89 810.85,320.89 ccw(c810.85,324.39) 813.33,321.92 827.52,336.11 904.71,336.11 922.05,318.77 1013.13,318.77 v1(1024.72,330.36)
  GND w3.5: v1(627.44,333.3) 641.71,347.57 669.05,347.57 cw(c669.11,331.97) 669.11,347.57 689.02,347.57 cw(c689.02,344.07) 691.48,346.56 703.61,334.44 v1(707.01,334.44)
  Bottom Layer w3.5: U3.16 v1(508.85,155.08) ; v1(1024.72,330.36) 1025.39,330.36 1041.05,314.69 U2.N6
F1_WEn: U1.F8 U2.M6 U3.15 | length 917.5
  Top Layer w3.5: U1.F8 808.42,272.4 999.43,272.4 1020.59,293.55 v1(1023.51,293.53)
  PWR w3.5: v1(527.63,180.02) 548.11,200.5 566.34,200.5 647.69,281.85 664.53,281.85 672.05,289.38 692.28,289.38 709.23,272.43 1002.41,272.43 v1(1023.51,293.53)
  Bottom Layer w3.5: U3.15 497.59,170.83 506.79,180.02 v1(527.63,180.02) ; U2.M6 1022.04,295 v1(1023.51,293.53)
F_R/Bn: U1.J5 U1.J6 U1.J8 U1.J9 U2.J5 U2.J6 U2.J8 U2.J9 | length 278.8
  Top Layer w3.5: v1(865.31,253.89) 865.8,253.89 883.68,236.01 U1.J6 U1.J5 ; v1(884.18,314.75) U1.J9
  GND w3.5: v1(865.31,253.89) 865.31,274.89 884.18,293.76 v1(884.18,314.75)
  Bottom Layer w3.5: v1(865.31,253.89) 865.8,253.89 883.74,235.95 U2.J8 U2.J9 ; U2.J6 U2.J5
F_WPn: U1.H5 U1.K9 U2.H5 U2.K9 U3.19 | length 1121.5
  Top Layer w3.5: v1(825.12,176.95) U1.H5 ; U1.K9 923.55,355.6 943.3,375.34 v1(943.3,376.82)
  GND w3.5: v1(543.58,100.07) 544.78,98.87 645.42,98.87 663.4,80.89 809.3,80.89 825.12,96.71 v1(825.12,176.95) 802.39,199.69 cw(c804.86,202.17) 801.36,202.17 801.36,260.61 769.81,292.16 769.81,344.32 778.06,352.56 cw(c780.54,350.09) 780.54,353.59 839.88,353.59 ccw(c839.88,357.09) 842.35,354.62 v1(860.97,373.24) 863.87,373.24 863.96,373.15 882.74,391.93 cw(c885.23,389.47) 885.2,392.97 ; 885.23,392.97 924.07,392.97 940.22,376.82 v1(943.3,376.82)
  Bottom Layer w3.5: U3.19 413.73,92.52 ccw(c417.23,92.55) 414.73,90.11 420.3,84.53 ccw(c422.78,87.01) 422.78,83.51 517.81,83.51 ccw(c517.81,87.01) 520.29,84.54 534.62,98.87 542.38,98.87 v1(543.58,100.07) ; v1(825.12,176.95) 903.98,176.95 U2.K9 ; U2.H5 844.87,355.6 860.97,371.7 v1(860.97,373.24)
GND: C1.2 C2.2 C3.2 C6.1 C7.1 C9.1 C10.1 C11.1 C12.2 R3.2 R9.2 R10.2 U1.D6 U1.E3 U1.E5 U1.E9 U1.E11 U1.G3 U1.G11 U1.J3 U1.J11 U1.L3 U1.L11 U1.N3 U1.N5 U1.N9 U1.N11 U1.P8 U2.D6 U2.E3 U2.E5 U2.E9 U2.E11 U2.G3 U2.G11 U2.J3 U2.J11 U2.L3 U2.L11 U2.N3 U2.N5 U2.N9 U2.N11 U2.P8 U3.3 U3.4 U3.7 U3.44 U3.65 U4.5 U4.7 U5.3 USB1.4 USB1.7 USB1.10 USB1.11 Y1.2 Y1.4 | length 535.1
  Bottom Layer w8: U3.44 272,328.31 285.41,314.91 U3.65 U3.65@350.74,296.81 ; U3.7 U3.65@350.74,296.81 ; U3.4 457.04,344.06 ; U3.3 472.79,359.8 457.04,344.06 ; U3.65@350.74,296.81 397.99,344.06 457.04,344.06
  other v1: 236.71,275.11 327.39,284.57 289.56,287.9 330.4,314.4 285.67,315.17 283.1,351.9 331.6,352.64
LED_0: D1.K U3.9 | length 39.3
  Top Layer w3.5: v1@452.64,250.19 454.99,252.54 v1(454.99,254.39)
  Bottom Layer w3.5: v1(454.99,254.39) 457.29,254.39 468.22,265.32 U3.9
MODE_1: R10.1 U3.45 | length 150.1
  Bottom Layer w3.5: R10.1 91.32,401.73 147.97,345.08 ccw(c150.44,347.56) 150.44,344.06 U3.45
NetC1_1: C1.1 R1.1 Y1.3 | length 77.9
  Bottom Layer w10: Y1.3 51.99,141.05 51.99,121.99 60.22,113.77 C1.1 60.32,111.9 84.55,111.9 R1.1
NetC4_1: C4.1 USB1.6 | length 221
  Top Layer w3.5: v1(57.52,402.09) 57.31,402.09 48.89,410.51 48.89,413.41 51.68,416.19 68.99,416.19 99.27,385.91 181.56,385.91 183.61,383.86 183.61,371.33 201.65,353.29 USB1.6
NetC5_1: C5.1 USB1.5 | length 243.5
  Top Layer w3.5: v1(26.76,401.9) 35.39,410.51 35.39,419 46.08,429.69 74.58,429.69 104.86,399.41 181.56,399.41 183.61,401.46 183.61,413.98 201.65,432.03 USB1.5
NetC8_2: C8.2 R2.1 R3.1 U4.6 | length 130.2
  Top Layer w10: U4.6 cw(c424.98,178.59) 424.98,199.1 R3.1 449.55,198.11 R2.1@449.55,167.9 ; C8.2 449.55,131.78 R2.1@449.55,167.9 ; R2.1 450.53,166.92 R2.1@449.55,167.9
NetD1_A: D1.A R8.1 | length 123.3
  Top Layer w3.5: D1.A 1273.5,246.29 R8.1
NetL1_1: L1.1 U4.4 | length 0.3
  Top Layer w10: L1.1@404.22,52.7 L1.1@404.35,52.82 ; U4.4@404.35,127.29 U4.4
NetR4_1: R4.1 U1.G8 | length 543.1
  Top Layer w3.5: v1(785.42,337.85) 785.42,336.31 805.44,316.29 U1.G8
  GND w3.5: v1(785.42,337.85) 804.44,318.83 842.16,318.83 853.69,330.36 895.93,330.36 909.83,316.46 970,316.46 971.71,314.75 1031.88,314.75 1041.73,304.91 v1(1225.51,304.91)
  Bottom Layer w3.5: v1(1225.51,304.91) 1270.48,304.91 R4.1
NetR5_1: R5.1 U1.G9 | length 624.4
  Top Layer w3.5: v1(785.75,377.12) 785.75,373.81 U1.G9
  GND w3.5: v1(785.75,377.12) 788.65,377.12 788.86,376.91 828.81,416.86 910.08,416.86 929.37,397.57 965.86,397.57 970.78,392.65 996.97,392.65 1006.43,383.19 1006.43,367.48 1020.8,353.11 1064.26,353.11 1097.99,319.38 1138.32,319.38 1217.07,398.13 v1(1245.01,398.13)
  Bottom Layer w3.5: v1(1245.01,398.13) 1255.39,398.13 R5.1
NetR6_2: R6.2 U1.L5 | length 369.6
  Top Layer w3.5: U1.L5 v1(982.61,176.95)
  PWR w3.5: v1(982.61,176.95) 996.81,191.15 cw(c999.26,188.66) 999.28,192.16 1021.96,192.18 cw(c1022.03,176.57) 1023,192.15 1060.02,189.97 ccw(c1061.35,212.54) 1062.56,189.97 1103.31,192.16 cw(c1104.17,176.57) 1104.24,192.18 1140.93,192.14 cw(c1140.93,188.64) 1143.42,191.1 v1(1247.86,86.66)
  Bottom Layer w3.5: v1(1247.86,86.66) 1268.87,86.66 R6.2
NetR7_2: R7.2 U1.L6 | length 348.6
  Top Layer w3.5: U1.L6 v1@981.58,217.35 ; v1@981.61,217.32 cw(c979.07,214.91) 982.57,214.93 v1(982.61,212.54)
  PWR w3.5: v1(982.61,212.54) 982.66,213.12 cw(c986.14,212.82) v1@986.07,216.32 ; v1@986.11,216.32 995.38,216.32 ccw(c995.38,219.82) 997.18,216.82 1012.43,225.94 cw(c1020.44,212.54) 1032.38,222.6 1049.43,202.45 ccw(c1061.35,212.54) 1062.18,196.96 1102.92,199.14 cw(c1104.17,176.57) 1104.17,199.18 1212.65,199.18 cw(c1212.65,195.68) v1@1215.12,198.16 ; v1@1215.13,198.15 1219.11,194.17 1218.16,193.22 v1(1217.44,193.22)
  Bottom Layer w3.5: v1(1217.44,193.22) 1267.96,193.22 1273.32,198.58 R7.2
OSCIN: C2.1 U3.35 Y1.1 | length 161.5
  Bottom Layer w6: C2.1 61.32,251.16 69.19,243.29 71.81,243.29 88.49,226.6 Y1.1 88.49,218.3 ccw(c94.49,218.3) 90.25,214.06 113.12,191.19 cw(c108.9,186.92) 113.52,190.75 114.76,189.26 ccw(c206.87,265.99) 119.53,183.87 ccw(c123.9,187.98) 123.9,181.98 148.07,181.98 ccw(c148.06,187.98) 152.32,183.76 153.38,184.82 cw(c157.62,180.58) 157.62,186.58 U3.35
OSCIO: R1.2 U3.34 | length 102.4
  Bottom Layer w6: R1.2 118.11,157.31 131.63,170.83 U3.34
RST: C12.1 U3.8 | length 32.3
  Top Layer w6: C12.1 454.88,279.54 v1(454.88,278.95)
  Bottom Layer w6: v1(454.88,278.95) 456.63,280.71 484.24,280.71 U3.8
SSRXM: U3.42 USB1.8 | length 433.7
  Top Layer w3.5: v1(114.72,323.22) 114.16,323.22 101.2,336.17 95.37,336.17 64.8,305.6 64.8,202 103.61,163.19 181.56,163.19 183.61,165.24 183.61,177.76 201.65,195.81 USB1.8
  Bottom Layer w3.5: v1(114.72,323.22) 117.44,320.5 124.32,320.5 128.14,316.68 128.14,310.17 140.37,297.94 153.61,297.94 153.9,297.65 168.8,297.65 U3.42
SSRXP: U3.43 USB1.9 | length 482.5
  Top Layer w3.5: v1(133.11,337.68) 121.12,349.67 89.78,349.67 51.3,311.19 51.3,196.41 98.02,149.69 181.56,149.69 183.61,147.64 183.61,135.11 201.65,117.07 USB1.9
  Bottom Layer w3.5: v1(133.11,337.68) 135.83,334.96 135.83,328.08 141.64,322.27 141.64,315.76 145.96,311.44 153.61,311.44 153.9,311.72 168.8,311.72 U3.43
SSTXM: C5.2 U3.39 | length 200.2
  Bottom Layer w3.5: C5.2 28.73,366.47 34.86,360.34 34.86,358.87 35.43,358.29 35.43,344.51 63.65,316.3 74.76,316.3 140.37,250.69 153.61,250.69 153.9,250.4 168.8,250.4 U3.39
SSTXP: C4.2 U3.40 | length 178
  Bottom Layer w3.5: C4.2 55.56,366.66 49.43,360.53 49.43,358.98 48.93,358.48 48.93,350.11 69.24,329.8 80.36,329.8 145.96,264.19 153.61,264.19 153.9,264.48 168.8,264.48 U3.40
USB5V: C3.1 C9.2 U4.2 U4.3 USB1.1
VSS_1: R9.1 U1.H11 U1.K3 U1.K10 | length 1294.5
  Top Layer w3.5: U1.H11 864.49,413.18 894.38,413.18 cw(c894.38,409.68) 896.87,412.14 914.48,394.51 ccw(c916.96,396.99) 916.96,393.49 U1.K10 943.89,413.83 943.89,464.33 1005.56,526 1097.29,526 1100.74,522.55 1100.74,418.58 1105.06,414.26 ccw(c1107.54,416.73) 1107.54,413.23 1184.97,413.23 ccw(c1184.97,416.73) 1186.64,413.66 1186.77,413.73 ; U1.K3 v1(943.24,98.21) 978.43,63.02 1125.26,63.02 1141.71,79.47 1141.71,292.85 1186.91,338.05 1221.93,338.05 1272.3,388.42 R9.1 1270.59,413.74 1186.78,413.74
pads on no net: U1.A1 U1.A2 U1.A3 U1.A4 U1.A10 U1.A11 U1.A12 U1.A13 U1.B1 U1.B2 U1.B3 U1.B4 U1.B10 U1.B11 U1.B12 U1.B13 U1.C1 U1.C2 U1.C3 U1.C4 U1.C10 U1.C11 U1.C12 U1.C13 U1.D1 U1.D2 U1.D12 U1.D13 U1.E1 U1.E2 U1.E12 U1.E13 U1.F5 U1.F6 U1.F9 U1.H3 U1.H4 U1.H6 U1.H10 U1.K4 U1.K8 U1.K11 U1.M5 U1.M8 U1.M9 U1.N1 U1.N2 U1.N12 U1.N13 U1.P1 U1.P2 U1.P12 U1.P13 U1.R1 U1.R2 U1.R3 U1.R4 U1.R10 U1.R11 U1.R12 U1.R13 U1.T1 U1.T2 U1.T3 U1.T4 U1.T10 U1.T11 U1.T12 U1.T13 U1.U1 U1.U2 U1.U3 U1.U4 U1.U10 U1.U11 U1.U12 U1.U13 U2.A1 U2.A2 U2.A3 U2.A4 U2.A10 U2.A11 U2.A12 U2.A13 U2.B1 U2.B2 U2.B3 U2.B4 U2.B10 U2.B11 U2.B12 U2.B13 U2.C1 U2.C2 U2.C3 U2.C4 U2.C10 U2.C11 U2.C12 U2.C13 U2.D1 U2.D2 U2.D12 U2.D13 U2.E1 U2.E2 U2.E12 U2.E13 U2.F5 U2.F6 U2.F9 U2.G8 U2.G9 U2.H3 U2.H4 U2.H6 U2.H10 U2.H11 U2.K3 U2.K4 U2.K8 U2.K10 U2.K11 U2.L5 U2.L6 U2.M5 U2.M8 U2.M9 U2.N1 U2.N2 U2.N12 U2.N13 U2.P1 U2.P2 U2.P12 U2.P13 U2.R1 U2.R2 U2.R3 U2.R4 U2.R10 U2.R11 U2.R12 U2.R13 U2.T1 U2.T2 U2.T3 U2.T4 U2.T10 U2.T11 U2.T12 U2.T13 U2.U1 U2.U2 U2.U3 U2.U4 U2.U10 U2.U11 U2.U12 U2.U13 U3.5 U3.30 U3.31 U3.32 U3.33 U4.1

## Polygon pours and split planes (outlines as drawn)
no net on Top Layer "NONET_L01_P003" (solid, pour order 3): 483.5,93.4
USB5V on Top Layer "USB5V_L01_P002" (solid, pour order 2): 231.3,169.4 231.4,169.3 260.8,169.3 260.8,212.4 261,212.6 305.3,212.6 305.3,165.7 305.5,165.9 340.8,165.9 340.8,121.2 304,121.2 304,141.2 303.9,141.3 303.9,142.8 231.4,142.8 231.3,142.9
no net on Top Layer "NONET_L01_P001" (solid, pour order 1): 221.5,168.7
NetL1_1 on Top Layer "NETL1_1_L01_P000" (solid, pour order 0): 389.9,71.8 417,72 417,127.41 389.9,127.41

## Silkscreen, mask and mechanical layers (free items; w line width, h text height)
Mechanical 1:
  the board outline again, w10